# EAGLE board board (EAGLE 9.6.2)
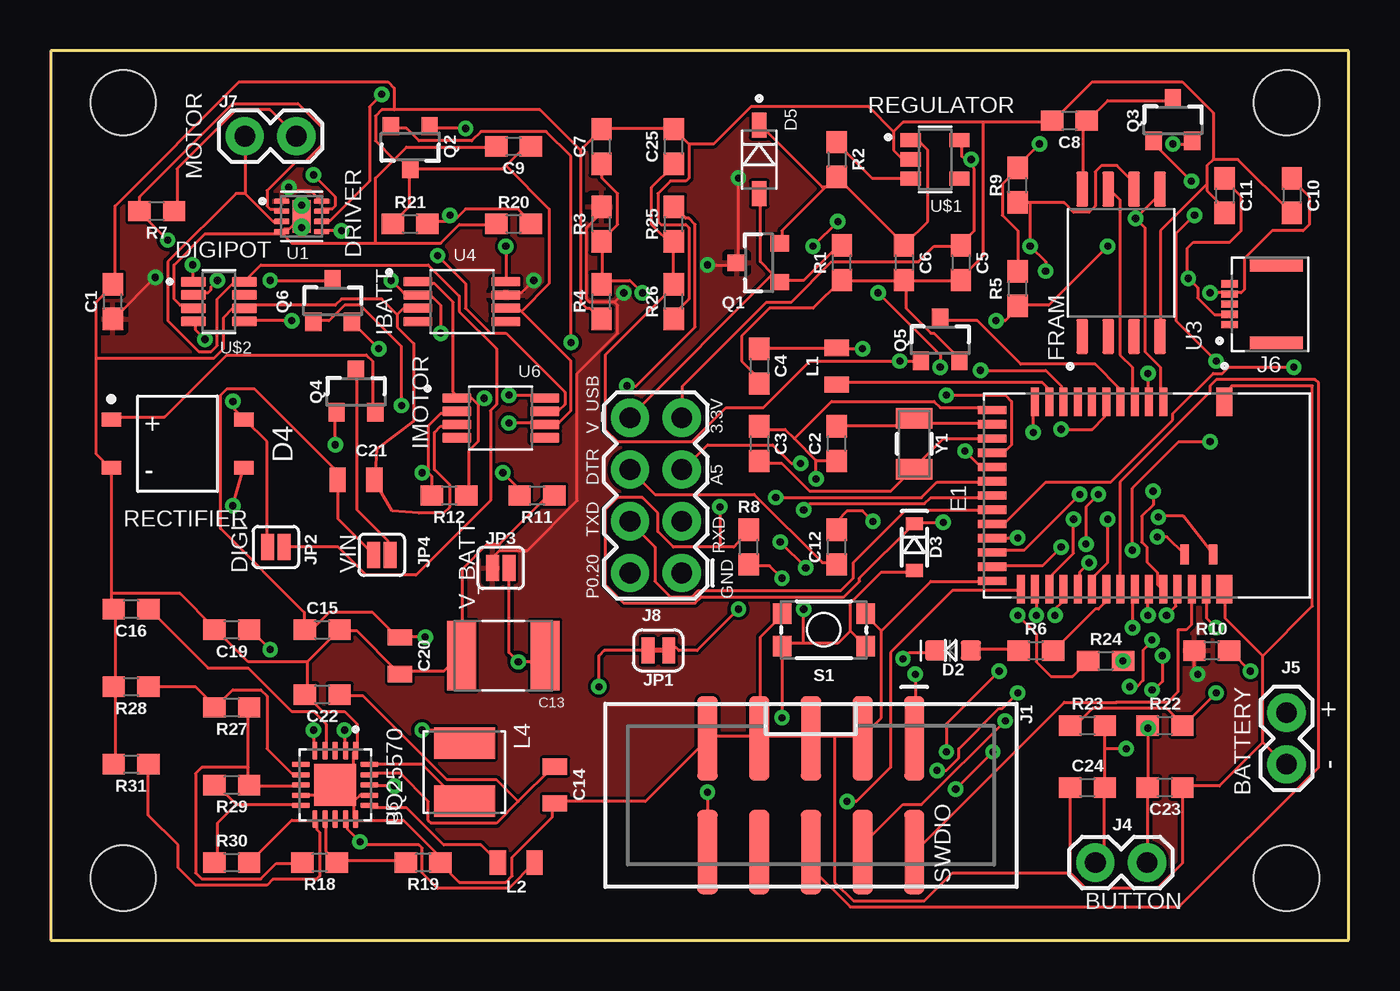
[diagram p0: board, top side]
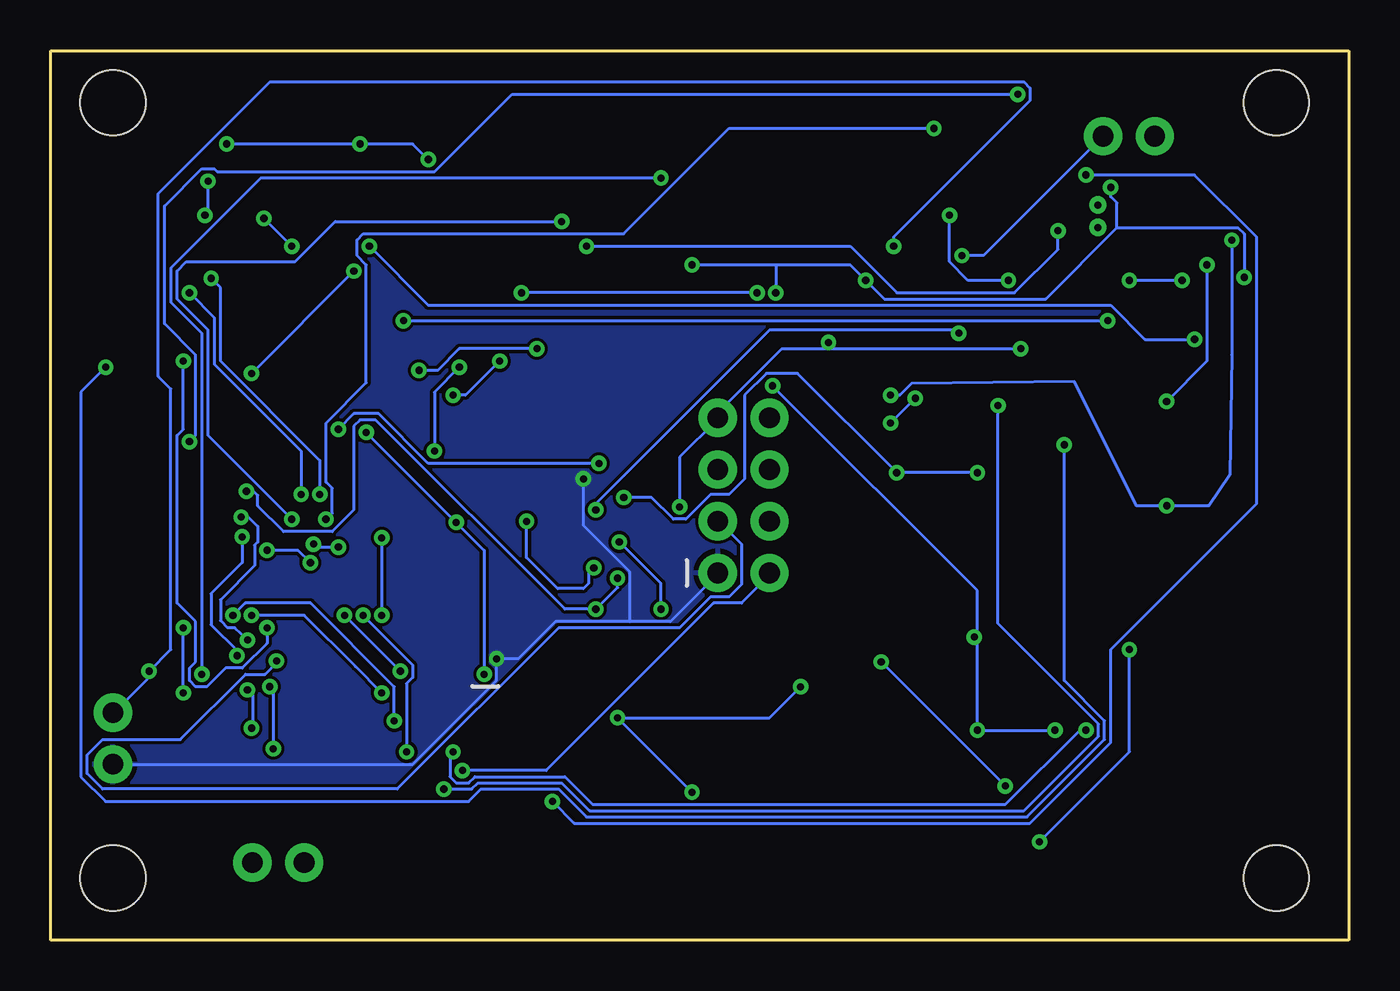
[diagram p1: board, bottom side, seen from below]

Size 63.75 x 43.69 mm. Coordinates in mm from the lower left corner, seen from the top.
Outline: 0,0 63.75,0 63.75,43.69 0,43.69 0,0
Copper layers (1*16): Top 0.035mm / dielectric 1.5mm / Bottom 0.035mm
Design rules "default": minimum track width 6mil, minimum drill 0.35mm, track to track 6mil, track to pad 6mil, pad to pad 6mil, via to via 6mil, smd to smd 6mil, copper to edge 40mil, drill to drill 6mil, minimum pad ring 10mil, minimum via ring 8mil, stop-mask expansion 4mil, vias tented up to drill 0mil, thermal gap 10mil
Holes 3.2 mm at 3.56,3.05 3.56,41.15 60.71,41.15 60.71,3.05

## Footprints (pad centres in the part's own frame; a part is rotated, then mirrored left to right if it is on the bottom)
0603 = smd 1.1 x 1: 1 -0.85,0; 2 0.85,0
CAPC4532X127N = smd 1.41 x 3.42: 1 -2.049,0; 2 2.049,0
0805 = smd 0.8 x 1.2: 1 -0.9,0; 2 0.9,0
LED-0603 = smd 1 x 1: A -0.877,0; C 0.877,0
SOD-323 = smd 0.63 x 0.83: A 1.15,0; C -1.15,0
COMCHIP_CDBHD140L-G_0 = smd 0.686 x 0.965: 1 1.18,3.255; 2 -1.18,3.255; 3 -1.18,-3.255; 4 1.18,-3.255
SOD3715X145N = smd 1.21 x 0.73: A 1.68,0; C -1.68,0
RAYTAC_MDBT42Q-512KV2 = smd 1.4 x 0.8: 1 -4.6,3.8; 39 4.6,3.8 | smd 1.4 x 0.4: 2 -4.6,0.8; 3 -4.6,0.1; 4 -4.6,-0.6; 5 -4.6,-1.3; 6 -4.6,-2; 7 -4.6,-2.7; 8 -4.6,-3.4; 9 -4.6,-4.1; 10 -4.6,-4.8; 11 -4.6,-5.5; 25 4.6,-6.2; 26 4.6,-5.5; 27 4.6,-4.8; 28 4.6,-4.1; 29 4.6,-3.4; 30 4.6,-2.7; 31 4.6,-2; 32 4.6,-1.3; 33 4.6,-0.6; 34 4.6,0.1; 35 4.6,0.8; 36 4.6,1.5; 37 4.6,2.2; 38 4.6,2.9 | smd 0.4 x 1.4: 12 -4.2,-7.6; 13 -3.5,-7.6; 14 -2.8,-7.6; 15 -2.1,-7.6; 16 -1.4,-7.6; 17 -0.7,-7.6; 18 0,-7.6; 19 0.7,-7.6; 20 1.4,-7.6; 21 2.1,-7.6; 22 2.8,-7.6; 23 3.5,-7.6; 24 4.2,-7.6 | smd 1 x 0.4: 40 2.9,3.25; 41 2.9,1.85
2X5-SHROUDED_SMD = smd 4.15 x 1: 1 -2.794,5.08; 2 2.794,5.08; 3 -2.794,2.54; 4 2.794,2.54; 5 -2.794,0; 6 2.794,0; 7 -2.794,-2.54; 8 2.794,-2.54; 9 -2.794,-5.08; 10 2.794,-5.08
1X02 = drill 1.016 pad 1.88: 1 0,0; 2 2.54,0
MOLEX_51281-0594 = smd 0.35 x 0.8: 1 -1,0; 2 -0.5,0; 3 0,0; 4 0.5,0; 5 1,0 | smd 0.6 x 2.6: SH1 -1.9,-2.3; SH2 1.9,-2.3
2X4 = drill 1.016 pad 1.88: 1 -3.81,-1.27; 2 -3.81,1.27; 3 -1.27,-1.27; 4 -1.27,1.27; 5 1.27,-1.27; 6 1.27,1.27; 7 3.81,-1.27; 8 3.81,1.27
SMT-JUMPER_2_NC_TRACE_SILK = smd 0.635 x 1.27: 1 -0.508,0; 2 0.508,0
SMT-JUMPER_2_NO_SILK = smd 0.635 x 1.27: 1 -0.406,0; 2 0.406,0
IND_LQH44PN220MP0L = smd 1.55 x 3: 1 -1.425,0; 2 1.425,0
SOT23-3 = smd 0.8 x 0.9: 1 -0.95,-1; 2 0.95,-1; 3 0,1.1
TACTILE_SWITCH_SMD_4.6X2.8MM = smd 0.9 x 1: 1 -2.05,-0.8; 2 2.05,-0.8; 3 2.05,0.8; 4 -2.05,0.8
SON50P200X200X80-9N = smd 0.74 x 0.28: 1 -0.985,0.75; 2 -0.985,0.25; 3 -0.985,-0.25; 4 -0.985,-0.75; 5 0.985,-0.75; 6 0.985,-0.25; 7 0.985,0.25; 8 0.985,0.75 | smd 0.9 x 1.6: 9 0,0 | drill 0.35 pad 0.61: 9_1 0,0.55; 9_2 0,-0.55
SOP127P797X210-8N = smd 1.72 x 0.59: 1 -3.62,1.905; 2 -3.62,0.635; 3 -3.62,-0.635; 4 -3.62,-1.905; 5 3.62,-1.905; 6 3.62,-0.635; 7 3.62,0.635; 8 3.62,1.905
SOP65P490X110-8N = smd 1.42 x 0.47: 1 -2.165,0.975; 2 -2.165,0.325; 3 -2.165,-0.325; 4 -2.165,-0.975; 5 2.165,-0.975; 6 2.165,-0.325; 7 2.165,0.325; 8 2.165,0.975
QFN50P350X350X100-21N = smd 0.88 x 0.26: 1 -1.685,1; 2 -1.685,0.5; 3 -1.685,0; 4 -1.685,-0.5; 5 -1.685,-1; 11 1.685,-1; 12 1.685,-0.5; 13 1.685,0; 14 1.685,0.5; 15 1.685,1 | smd 0.26 x 0.88: 6 -1,-1.685; 7 -0.5,-1.685; 8 0,-1.685; 9 0.5,-1.685; 10 1,-1.685; 16 1,1.685; 17 0.5,1.685; 18 0,1.685; 19 -0.5,1.685; 20 -1,1.685 | smd 2.05 x 2.05: 21 0,0
IC_XC8107AC20MR-G = smd 1 x 0.7: 1 -1.2,0.95; 2 -1.2,0; 3 -1.2,-0.95; 4 1.2,-0.95; 5 1.2,0.95
SOT65P280X145-8N = smd 1.21 x 0.48: 1 -1.255,0.975; 2 -1.255,0.325; 3 -1.255,-0.325; 4 -1.255,-0.975; 5 1.255,-0.975; 6 1.255,-0.325; 7 1.255,0.325; 8 1.255,0.975
CRYSTAL-SMD-3.2X1.5MM = smd 1 x 1.8: P$1 -1.25,0; P$2 1.25,0

## Placement (x,y rotation side)
C1  0.1uF  [0603]  3.05,31.37 90 top
C2  22pF  [0603]  38.61,24.38 90 top
C3  22pF  [0603]  34.8,24.38 270 top
C4  1.0uF  [0603]  34.8,28.19 270 top
C5  10uF  [0603]  44.7,33.27 270 top
C6  10uF  [0603]  41.91,33.27 270 top
C7  10uF  [0603]  27.05,38.99 90 top
C8  0.1uF  [0603]  50.04,40.26 180 top
C9  0.1uF  [0603]  22.73,38.99 180 top
C10  300pF  [0603]  60.96,36.58 270 top
C11  300pF  [0603]  57.66,36.58 270 top
C12  0.1uF  [0603]  38.61,19.3 90 top
C13  100uF  [CAPC4532X127N]  22.23,13.97 180 top
C14  4.7uF  [0805]  24.77,7.62 270 top
C15  0.1uF  [0603]  13.34,15.24 0 top
C16  0.01uF  [0603]  3.94,16.26 180 top
C19  22uF  [0603]  8.89,15.24 180 top
C20  4.7uF  [0805]  17.14,13.97 270 top
C21  2.2uF  [0805]  14.99,22.61 0 top
C22  0.1uF  [0603]  13.34,12.07 180 top
C23  33nF  [0603]  54.74,7.49 180 top
C24  33nF  [0603]  50.93,7.49 0 top
C25  10uF  [0603]  30.61,38.99 90 top
D2  WHITE  [LED-0603]  44.32,14.22 180 top
D3  250mA/100V  [SOD-323]  42.42,19.3 270 top
D4  COMCHIP_CDBHD140L-GCOMCHIP_CDBHD140L-G_0_0  [COMCHIP_CDBHD140L-G_0]  6.22,24.38 90 top
D5  SCHOTTKY  [SOD3715X145N]  34.8,38.35 270 top
E1  MDBT42Q-512KV2  [RAYTAC_MDBT42Q-512KV2]  53.85,21.84 270 top
J1  [2X5-SHROUDED_SMD]  37.34,7.11 270 top
J4  [1X02]  53.85,3.81 180 top
J5  [1X02]  60.71,11.18 270 top
J6  51281-0594  [MOLEX_51281-0594]  57.91,31.24 90 top
J7  [1X02]  9.52,39.5 0 top
J8  [2X4]  29.72,21.84 90 top
JP1  JUMPER-SMT_2_NC_TRACE_SILK  [SMT-JUMPER_2_NC_TRACE_SILK]  29.84,14.22 180 top
JP2  JUMPER-SMT_2_NO_SILK  [SMT-JUMPER_2_NO_SILK]  11.05,19.3 180 top
JP3  JUMPER-SMT_2_NO_SILK  [SMT-JUMPER_2_NO_SILK]  22.1,18.29 0 top
JP4  JUMPER-SMT_2_NO_SILK  [SMT-JUMPER_2_NO_SILK]  16.26,18.92 180 top
L1  10µH  [0805]  38.61,28.19 90 top
L2  3.3µH/±20%/450mA  [0805]  22.86,3.81 180 top
L4  LQH44PN220MP0L  [IND_LQH44PN220MP0L]  20.32,8.25 270 top
Q1  [SOT23-3]  34.8,33.27 90 top
Q2  2.5A/30V/105mΩ  [SOT23-3]  17.65,38.99 180 top
Q3  2.5A/30V/105mΩ  [SOT23-3]  55.12,40.26 0 top
Q4  2.5A/30V/105mΩ  [SOT23-3]  14.99,26.92 0 top
Q5  5.8A/30V/35mΩ  [SOT23-3]  43.69,29.46 0 top
Q6  2.5A/30V/105mΩ  [SOT23-3]  13.84,31.37 0 top
R1  100k  [0603]  38.86,33.27 90 top
R2  100k  [0603]  38.61,38.35 270 top
R3  820K  [0603]  27.05,35.18 90 top
R4  2M  [0603]  27.05,31.37 90 top
R5  10k  [0603]  47.5,32 90 top
R6  1k  [0603]  48.39,14.22 0 top
R7  1K  [0603]  5.21,35.81 180 top
R8  10k  [0603]  34.29,19.3 90 top
R9  10k  [0603]  47.5,37.08 90 top
R10  1K  [0603]  57.02,14.22 0 top
R11  10k  [0603]  23.88,21.84 180 top
R12  10k  [0603]  19.56,21.84 180 top
R18  4.22M  [0603]  13.21,3.81 180 top
R19  8.66M  [0603]  18.29,3.81 180 top
R20  10k  [0603]  22.73,35.18 0 top
R21  10k  [0603]  17.65,35.18 0 top
R22  1M  [0603]  54.74,10.54 0 top
R23  1M  [0603]  50.93,10.54 0 top
R24  1k  [0603]  51.82,13.72 0 top
R25  820k  [0603]  30.61,35.18 90 top
R26  2.0M  [0603]  30.61,31.37 90 top
R27  7.5M  [0603]  8.89,11.43 180 top
R28  5.76M  [0603]  3.94,12.45 180 top
R29  887K  [0603]  8.89,7.62 180 top
R30  6.98M  [0603]  8.89,3.81 0 top
R31  5.36M  [0603]  3.94,8.64 180 top
S1  [TACTILE_SWITCH_SMD_4.6X2.8MM]  37.97,15.24 0 top
U1  DRV8837DSGR  [SON50P200X200X80-9N]  12.32,35.56 0 top
U3  MB85RC256VPF-G-JNERE2  [SOP127P797X210-8N]  52.58,33.27 90 top
U4  MAX9934TAUA  [SOP65P490X110-8N]  20.19,31.37 0 top
U5  BQ25570RGRR  [QFN50P350X350X100-21N]  13.97,7.62 270 top
U6  MAX9934TAUA  [SOP65P490X110-8N]  22.1,25.65 0 top
U$1  IC_X8107AC20MR-GSMD  [IC_XC8107AC20MR-G]  43.43,38.35 0 top
U$2  AD5273  [SOT65P280X145-8N]  8.26,31.37 0 top
Y1  32.768kHz  [CRYSTAL-SMD-3.2X1.5MM]  42.42,24.38 270 top

## Library data of the parts
C1 C8 C9 C12 C15 C16 C19 C22 = SparkFun-Capacitors; PROD_ID: CAP-00810
C2 C3 = SparkFun-Capacitors; PROD_ID: CAP-07876
C4-C7 = SparkFun-Capacitors; PROD_ID: CAP-00868
C10 C11 C23 C24 = SparkFun-Capacitors; PROD_ID: CAP-07887
C13 = LD125C274JAB2A; AVAILABILITY: In Stock; DESCRIPTION: CAP 0.27UF 50VDC X7R 5% SMD 1812; MF: AVX; MP: LD125C274JAB2A; PACKAGE: 1812 AVX; PRICE: None; PURCHASE-URL: https://pricing.snapeda.com/search/part/LD125C274JAB2A/?ref=eda
C14 C20 = SparkFun-Capacitors; PROD_ID: CAP-11625
C21 = SparkFun-Capacitors; PROD_ID: CAP-11624
C25 = SparkFun-Capacitors; PROD_ID: CAP-11015
D2 = SparkFun-LED; PROD_ID: DIO-09004
D3 = SparkFun-DiscreteSemi; PROD_ID: DIO-09646
D4 = Comchip - CDBHD140L-G; CENTROID_NOT_SPECIFIED: No; CURRENT_-_AVERAGE_RECTIFIED_(IO): 1A; CURRENT_-_REVERSE_LEAKAGE_@_VR: 500µA @ 40V; DATASHEET: http://www.comchiptech.com/cms/UserFiles/CDBHD140L-G%20Thru.%20CDBHD1100L-G%20RevC.PDF; DIGIKEY_DESCRIPTION: DIODE SCHOTTKY 1A 40V TO-269AA; DIGIKEY_PART_NUMBER: 641-1210-1-ND; LEAD_FREE: yes; MANUFACTURER_PRODUCT_PAGE: http://www.comchiptech.com/products_search.php?banner=top2&partnumber1=CDBHD140L-G&link=products_search.php; MF: Comchip; MFG_PACKAGE_IDENT: Mini-DIP; MOUSER_PART_NUMBER: 750-CDBHD140L-G; MPN: CDBHD140L-G; PACKAGE: 4-BESOP; PREFIX: D; ROHS: yes; TEMPERATURE_RANGE_HIGH: +125°C; TEMPERATURE_RANGE_LOW: -55°C; VOLTAGE_-_FORWARD_(VF)_(MAX)_@_IF: 440mV @ 1A; VOLTAGE_-_PEAK_REVERSE_(MAX): 40V
D5 = 1N5819HW-7-F; AVAILABILITY: In Stock; DESCRIPTION: Diode Schottky 40 V 1A Surface Mount SOD-123; MF: Diodes Inc.; MP: 1N5819HW-7-F; PACKAGE: SOD-123 Fairchild Semiconductor; PRICE: None; PURCHASE-URL: https://pricing.snapeda.com/search/part/1N5819HW-7-F/?ref=eda
E1 = MDBT42Q-512KV2; AVAILABILITY: In Stock; DESCRIPTION: 802.15.4, Bluetooth Bluetooth v5.2, Zigbee® Transceiver Module 2.36GHz ~ 2.5GHz Integrated, Chip Surface Mount; MF: Raytac Corporation; MP: MDBT42Q-512KV2; PACKAGE: SMD-41 Raytac Corporation; PRICE: None; PURCHASE-URL: https://pricing.snapeda.com/search/part/MDBT42Q-512KV2/?ref=eda
J1 = SparkFun-Connectors; PROD_ID: CONN-09508
J4 J5 J7 J8 = SparkFun-Connectors
J6 = 51281-0594; AVAILABILITY: In Stock; DESCRIPTION: 5 Position FFC, FPC Connector Contacts, Top and Bottom 0.020 (0.50mm) Surface Mount, Right Angle; MF: Molex; MP: 51281-0594; PACKAGE: None; PRICE: None; PURCHASE-URL: https://pricing.snapeda.com/search/part/51281-0594/?ref=eda
JP1-JP4 = SparkFun-Jumpers
L1 L2 = SparkFun-Coils; PROD_ID: NDUC-13076
L4 = LQH44PN220MP0L; AVAILABILITY: In Stock; DESCRIPTION: Inductor with Inductance: 22uH Tol. +/-20%, Package: 1515 (4040); MF: Murata; MP: LQH44PN220MP0L; PACKAGE: NONSTANDARD; PRICE: None; PURCHASE-URL: https://pricing.snapeda.com/search/part/LQH44PN220MP0L/?ref=eda
Q1-Q4 Q6 = SparkFun-DiscreteSemi; PROD_ID: TRANS-11308
Q5 = SparkFun-DiscreteSemi; PROD_ID: TRANS-12988
R1 R2 R18 R19 = SparkFun-Resistors; PROD_ID: RES-07828
R3 R4 R22 R23 = SparkFun-Resistors; PROD_ID: RES-07868
R5 R8 R9 R11 R12 R20 R21 = SparkFun-Resistors; PROD_ID: RES-00824
R6 R24 R27-R31 = SparkFun-Resistors; PROD_ID: RES-07856
R7 = SparkFun-Resistors; PROD_ID: RES-12535
R10 = SparkFun-Resistors; PROD_ID: RES-08269
R25 = SparkFun-Resistors; PROD_ID: RES-13247
R26 = SparkFun-Resistors; PROD_ID: RES-10054
S1 = SparkFun-Switches; PROD_ID: SWCH-13065
U1 = DRV8837DSGR; AVAILABILITY: In Stock; DESCRIPTION: 11-V, 1.8-A H-bridge motor driver 8-WSON -40 to 85; MF: Texas Instruments; MP: DRV8837DSGR; PACKAGE: WSON-8 Texas Instruments; PRICE: None; PURCHASE-URL: https://pricing.snapeda.com/search/part/DRV8837DSGR/?ref=eda
U3 = MB85RC256VPF-G-JNERE2; AVAILABILITY: In Stock; MF: Fujitsu Semiconductor; MP: MB85RC256VPF-G-JNERE2; PACKAGE: None; PRICE: None; PURCHASE-URL: https://pricing.snapeda.com/search/part/MB85RC256VPF-G-JNERE2/?ref=eda
U4 U6 = MAX9934TAUA; AVAILABILITY: In Stock; DESCRIPTION: Current Sense Amplifier 1 Circuit 8-uMAX-EP|8-uSOP-EP; MF: Maxim Integrated; MP: MAX9934TAUA+T; PACKAGE: MICRO MAX-8 Maxim; PRICE: None; PURCHASE-URL: https://pricing.snapeda.com/search/part/MAX9934TAUA+T/?ref=eda
U5 = BQ25570RGRR; AVAILABILITY: In Stock; DESCRIPTION: Ultra Low power Harvester power Management IC with boost charger, and Nanopower Buck Converter 20-VQFN -40 to 125; MF: Texas Instruments; MP: BQ25570RGRR; PACKAGE: VQFN-20 Texas Instruments; PRICE: None; PURCHASE-URL: https://pricing.snapeda.com/search/part/BQ25570RGRR/?ref=eda
U$1 = XC6210B332MR
U$2 = SOT65P280X145-8N
Y1 = SparkFun-Clocks; PROD_ID: XTAL-13062

## Nets
3.3V: C5.1 D3.C E1.11 J1.1 J8.7 Q2.2 Q3.2 Q6.2 R5.2 R8.2 R9.2 U$1.5
A5: E1.6 J8.5
BEN: E1.28 U5.5
CAPREC1: C23.2 E1.41 J4.1 R22.1
CAPREC2: C24.2 E1.40 J4.2 R23.2
CAPSEND: E1.38 R22.2 R23.1
DIGIEN: E1.26 Q6.1
DIGIPOT: D4.4 JP2.2 U$2.1
DTR: C12.1 J8.6
EN: R2.1 U$1.3
GND: C1.2 C2.1 C3.1 C4.2 C5.2 C6.2 C7.2 C8.2 C9.2 C10.2 C11.2 C13.2 C14.2 C15.2 C16.2 C19.2 C20.2 C21.2 C22.2 C23.1 C24.1 C25.2 D2.C D4.2 E1.1 E1.12 E1.24 E1.39 J1.3 J1.5 J1.7 J1.9 J5.2 J8.1 Q5.2 R1.1 R4.1 R11.1 R19.1 R20.1 R26.1 R28.2 R31.2 S1.3 S1.4 U1.4 U1.9 U3.4 U4.3 U5.1 U5.9 U5.15 U5.17 U5.21 U6.3 U$1.2 U$2.3 U$2.6
IBATT: E1.18 R20.2 R21.2 U4.2
IMOTOR: E1.17 R11.2 R12.2 U6.2
INTERRUPT: E1.5 Q5.3
LED1: E1.31 R6.2
MI: D4.3 R7.2 U1.2 U6.8
MIN1: J7.2 R7.1 U6.7
MIN2: J7.1 JP2.1 U1.3 U$2.8
MONEN: E1.27 Q2.1
N$1: E1.10 L1.1
N$2: L4.2 U5.20
N$3: C3.2 E1.14 Y1.P$2
N$4: C4.1 E1.9 L1.2
N$5: D4.1 Q4.2
N$6: L2.2 U5.16
N$7: C12.2 JP1.1
N$8: C6.1 D5.C Q1.2 R2.2 U$1.1
N$9: Q6.3 U$2.2
N$10: C13.1 JP3.2 U5.18
N$11: C2.2 E1.13 Y1.P$1
N$12: C8.1 Q3.3 U3.8
N$13: JP4.1 Q4.3
N$14: D2.A R6.1
N$15: J8.3 R24.2
NFC1: C11.1 E1.22 J6.2
NFC2: C10.1 E1.23 J6.4
OK_HYST: R29.2 R30.1 U5.10
OK_PROG: R30.2 R31.1 U5.11
P0.20: E1.34 J8.2
PWM1: E1.29 U1.6
PWM2: E1.30 U1.5
RAMEN: E1.33 Q3.1
RECEN: E1.20 Q4.1
RESET: D3.A E1.35 J1.10 JP1.2 R8.1 S1.1 S1.2
RXD: E1.21 R24.1
SCL: E1.3 R9.1 U3.6 U$2.4
SDA: E1.2 R5.1 U3.5 U$2.5
SLP: E1.25 U1.7
SWDCLK: E1.36 J1.4
SWDIO: E1.37 J1.2
SWO: E1.32 J1.6
TXD: E1.19 J8.4
V_BATT: C1.1 JP3.1 Q1.3 R3.2 R10.1 U1.1 U1.8 U4.7
V_USB: D5.A J8.8 Q1.1 R1.2
VBAT_OV: R27.2 R28.1 U5.7
VBATM: C7.1 E1.16 R3.1 R4.2
VCC: C9.1 Q2.3 R12.1 R21.1 U4.1 U4.6 U6.1 U6.6
VIN: C15.1 C20.1 C21.1 JP4.2 L4.1 R25.2 U5.2
VINM: C25.1 E1.15 Q5.1 R25.1 R26.2
VLIPO: J5.1 R10.2 U4.8
VOUT: C19.1 L2.1 U5.14
VOUT_SET: R18.1 R19.2 U5.12
VRDIV: R18.2 R27.1 R29.1 U5.8
VREF_SAMP: C16.1 U5.4
VSTOR: C14.1 C22.1 U5.19
WP: E1.4 U3.7

## Tracks (layer width: path | path; a pad name or v marks a point on that pad's centre or on a via)
3.3V  (via drill 0.35)
  Top 0.152: 32.87,19.3 33.55,19.3 R8.2 | 32.87,19.3 30.58,19.3 29.82,20.07 29.82,20.98 29.06,21.74 27.84,21.74 27.23,21.13 27.23,17.47 28.14,16.56 31.65,16.56 31.95,16.87 38.96,16.87 39.73,17.63 39.73,17.78 42.32,20.37 D3.C 42.47,20.52 v43.84,20.52 | v48.26,24.94 48.26,26.31 E1.11 | v42.47,13.06 42.47,10.01 J1.1 | v55.12,39.12 56.03,39.12 Q3.2 | v48.56,39.12 47.5,38.05 R9.2 47.5,37.9 46.74,37.14 46.74,35.61 47.5,34.85 R5.2 | 45.06,38.2 45.36,37.9 45.36,34.85 44.75,34.24 C5.1 44.6,34.09 43.38,34.09 42.62,33.33 38.35,33.33 36.37,31.34 35.15,31.34 31.04,27.23 31.04,25.71 J8.7 | 45.06,38.2 44.75,38.51 44.75,39.27 U$1.5 | v16.1,29.06 14.88,30.28 Q6.2 | v25.55,29.36 25.55,38.51 24.33,39.73 21.13,39.73 20.68,39.27 18.09,39.27 17.48,39.88 16.71,39.88 Q2.2 | 45.06,38.2 v45.21,38.35 | v32.87,21.29 32.87,19.3
  Bottom 0.152: v48.26,24.94 v43.84,20.52 42.47,19.15 v42.47,13.06 | v55.12,39.12 v48.56,39.12 45.97,39.12 v45.21,38.35 | 25.55,29.06 27.84,29.06 30.89,26.01 30.89,25.71 J8.7 31.04,25.55 32.87,23.72 v32.87,21.29 | 25.55,29.06 v16.1,29.06 | 25.55,29.06 v25.55,29.36
A5  (via drill 0.35)
  Top 0.152: v49.63,25.1 51.16,25.1 51.77,25.71 51.77,26.31 E1.6 | v36.83,23.42 36.37,23.42 35.46,24.33 32.26,24.33 31.04,23.11 J8.5
  Bottom 0.152: v49.63,25.1 48.87,25.86 47.65,25.86 45.21,23.42 v36.83,23.42
BEN  (via drill 0.35)
  Top 0.152: v12.9,10.31 12.9,9.4 U5.5 | v43.99,9.25 43.99,10.62 v46.58,13.21 | v49.33,15.95 49.33,16.26 49.63,16.56 49.63,17.17 E1.28
  Bottom 0.152: v12.9,10.31 13.21,10.31 16.87,6.65 37.14,6.65 38.51,8.03 42.93,8.03 43.23,7.72 43.84,7.72 44.14,8.03 44.14,9.09 v43.99,9.25 | v49.33,15.95 v46.58,13.21
CAPREC1  (via drill 0.35)
  Top 0.152: R22.1 53.9,10.46 v53.9,10.41 53.9,7.57 C23.2 53.9,7.42 53.9,3.91 J4.1 | v54.36,19.81 54.83,19.81 E1.41 | v54.61,13.97 54.61,12.7 54.1,12.19 v54.1,12.29
  Bottom 0.152: v54.36,19.81 54.36,18.54 55.88,17.02 55.88,15.49 54.61,14.22 v54.61,13.97 | v54.1,12.29 53.85,12.04 53.85,10.41 v53.9,10.41
CAPREC2  (via drill 0.35)
  Top 0.152: 51.77,9.4 51.77,10.46 R23.2 | 51.77,9.4 51.77,7.57 C24.2 51.77,7.42 51.77,4.37 51.31,3.91 J4.2 | v54.4,20.78 54.45,20.83 55.63,20.83 E1.40 | v53,12.45 53.34,12.45 53.65,12.75 53.65,14.22 54.1,14.73 v54.09,14.74 | v52.83,9.4 51.77,9.4
  Bottom 0.152: v54.4,20.78 54.05,20.78 53.59,20.32 53.59,19.55 53.74,19.4 53.74,18.39 55.42,16.72 55.42,15.7 55.06,15.34 54.71,15.34 v54.09,14.74 | v53,12.45 52.83,12.28 v52.83,9.4
CAPSEND  (via drill 0.35)
  Top 0.152: R23.1 50.09,10.62 50.39,10.62 51.16,11.38 54.81,11.38 55.58,10.62 R22.2 55.73,10.62 v57.25,12.14 | v57.25,15.34 56.79,15.8 56.79,17.17 E1.38
  Bottom 0.152: v57.25,12.14 v57.25,15.34
DIGIEN  (via drill 0.35)
  Top 0.152: v17.22,26.26 17.22,29.16 15.19,31.19 14.43,31.19 13.66,30.43 12.9,30.43 Q6.1 | v46.28,9.25 v44.45,7.42 | v48.41,15.95 48.41,17.17 E1.26
  Bottom 0.152: v17.22,26.26 17.22,15.54 12.29,10.62 12.29,10.01 15.95,6.35 37.29,6.35 38.66,7.72 42.77,7.72 43.08,7.42 v44.45,7.42 | v46.28,9.25 46.28,12.6 45.97,12.9 45.97,13.51 v48.41,15.95
DIGIPOT  (via drill 0.35)
  Top 0.152: JP2.2 10.62,19.3 10.62,24.49 9.55,25.55 D4.4 9.4,25.71 8.94,26.16 v8.94,26.47 | v6.96,33.17 6.96,32.41 U$2.1
  Bottom 0.152: v6.96,33.17 6.96,28.45 v8.94,26.47
DTR
  Top 0.152: J8.6 29.67,21.89 34.54,21.89 37.9,18.54 38.51,18.54 C12.1
EN
  Top 0.152: U$1.3 42.16,37.44 40.33,37.44 38.66,39.12 R2.1
GND  (via drill 0.35)
  Top 0.152: U1.4 11.23,34.7 7.57,34.7 6.05,33.17 6.05,31.5 6.35,31.19 6.96,31.19 U$2.3 | 15.95,34.24 11.84,34.24 11.38,34.7 U1.4 | 15.95,34.24 19.15,34.24 20.07,35.15 21.74,35.15 R20.1 | 16.87,38.35 15.95,37.44 15.95,34.24 | 16.87,38.35 17.48,38.96 21.74,38.96 C9.2 | 56.79,37.14 56.79,38.05 57.1,38.35 | 56.79,37.14 56.79,36.83 57.56,36.07 57.56,35.76 C11.2 | 57.1,38.35 58.32,38.35 60.91,35.76 C10.2 | 56.79,37.14 54.51,34.85 54.51,29.67 U3.4 | 31.34,39.12 31.34,37.44 31.19,37.29 30.43,37.29 29.82,36.68 29.82,35.31 29.97,35.15 31.19,35.15 31.34,35 31.34,31.5 30.73,30.89 30.73,30.58 R26.1 | 31.34,39.12 30.73,39.73 C25.2 30.58,39.88 27.08,39.88 C7.2 26.92,39.73 26.01,38.81 | 26.01,38.81 26.01,31.34 26.31,31.04 26.47,31.04 26.92,30.58 R4.1 | U$1.2 41.86,38.35 41.4,38.81 41.4,39.73 | 41.4,39.73 41.86,40.18 45.82,40.18 | 45.82,40.18 49.17,40.18 C8.2 49.33,40.34 51.16,42.16 55.58,42.16 57.1,40.64 57.1,38.35 | 42.01,32.41 42.01,31.04 43.23,29.82 43.38,29.82 44.6,28.6 Q5.2 | 42.01,32.41 44.6,32.41 C5.2 44.75,32.56 45.82,33.63 45.82,40.18 | 42.01,32.41 C6.2 41.86,32.41 38.96,32.41 R1.1 38.81,32.41 37.44,31.04 35.31,31.04 33.93,29.67 33.93,28.45 34.7,27.69 34.7,27.38 C4.2 | 31.34,39.12 32.56,39.12 34.39,40.95 40.18,40.95 41.4,39.73 | 16.87,38.35 15.95,39.27 15.95,40.49 16.26,40.79 16.87,40.79 | 16.87,40.79 24.03,40.79 26.01,38.81 | 37.59,23.57 38.51,23.57 C2.1 | 36.53,24.64 36.07,25.1 34.85,25.1 C3.1 | 36.53,24.64 37.59,23.57 | 36.53,24.64 38.35,26.47 43.38,26.47 43.69,26.16 46.13,26.16 E1.12 | v41.86,13.82 42.16,14.12 43.38,14.12 D2.C | v37.59,22.66 37.59,23.57 | 50.09,3.3 50.09,7.42 C24.1
  Top 0.152: 50.09,3.3 50.85,2.54 54.36,2.54 55.58,3.76 55.58,7.42 C23.1 55.73,7.57 57.4,7.57 59.54,9.7 | 59.54,13.97 57.71,15.8 57.71,17.17 E1.39 | 59.54,9.7 59.54,13.97 | 59.54,9.7 60.6,8.64 J5.2 | 59.54,13.97 61.98,16.41 61.98,27.23 58.01,27.23 57.71,26.92 57.71,26.47 E1.1 | 17.02,30.73 17.02,30.12 17.83,29.31 17.83,25.5 16,24.13 15.91,22.56 | 17.02,30.73 17.32,31.04 17.93,31.04 U4.3 | 17.02,30.73 16.26,31.5 14.27,31.5 13.97,31.19 9.55,31.19 U$2.6 9.4,31.04 8.94,31.04 8.48,30.58 8.48,29.06 8.03,28.6 2.23,28.6 | U6.3 19.91,25.25 19.15,25.25 18.85,24.94 18.85,23.11 19.61,22.35 19.61,21.29 19.3,20.98 18.09,20.98 16.76,21.08 15.91,22.56 | 3.15,12.45 3.15,8.64 R31.2 | 3,17.02 3,16.26 C16.2 3.15,16.26 3.15,12.45 | 3,17.02 3,23.11 D4.2 2.84,23.27 2.23,23.88 2.23,28.6 | 2.23,28.6 2.23,31.34 3,32.11 C1.2 3.15,32.26 3.15,36.07 9.25,42.16 16.56,42.16 16.87,41.86 16.87,40.79 | 3.15,12.45 R28.2 | 34.85,10.01 34.85,14.88 35.92,15.95 S1.4 | 40.79,15.19 40.03,15.95 S1.3 | 40.79,15.19 40.79,10.92 39.88,10.01 | 40.79,15.19 43.23,17.63 46.13,17.63 E1.24 | 39.88,10.01 38.51,10.01 | 38.51,10.01 37.44,10.01 J1.5 37.29,10.01 34.85,10.01 | 39.88,10.01 J1.3 | 34.85,10.01 J1.7 34.7,10.01 32.26,10.01 J1.9 32.26,9.86 29.21,6.81 24.79,6.81 C14.2 24.64,6.65 24.64,6.04 22.66,4.06 22.66,3.15 22.35,2.84 20.07,2.84 19.15,3.76 R19.1 19,3.91 19,4.22 17.32,5.89 15.04,5.89 U5.15 14.88,6.04 14.88,6.65 | 13.97,7.57 13.51,7.11 12.29,7.11 U5.9 | 14.88,6.65 14.88,6.81 15.19,7.11 15.65,7.11 U5.17 | 14.88,6.65 13.97,7.57 | 13.97,7.57 U5.21 13.97,7.72 14.88,8.64 14.88,9.25 U5.1 15.04,9.4 15.04,10.62 14.43,11.23 13.36,11.23 12.6,11.99 C22.2 12.6,12.14 12.6,13.67
  Top 0.152: 12.6,13.67 14.12,15.19 C15.2 14.27,15.19 15.04,15.19 17.02,13.21 C20.2 17.17,13.21 19.3,13.21 20.07,13.97 C13.2 20.22,13.97 20.22,18.24 21.44,19.46 22.05,19.46 24.33,21.74 24.64,21.74 R11.1 | 12.6,13.67 9.7,13.67 8.18,15.19 C19.2 8.03,15.34 6.35,17.02 3,17.02 | 50.09,3.3 44.3,3.3 42.93,1.93 39.42,1.93 38.51,2.84 38.51,10.01 | U1.4 11.46,34.94 11.7,34.94 U1.9 | 15.91,22.56 C21.2
  Bottom 0.152: 35.31,15.65 33.33,15.65 31.04,17.93 J8.1 | 35.31,15.65 38.96,15.65 40.79,13.82 v41.86,13.82 41.86,12.75 45.97,8.64 J5.2 | v37.59,22.66 37.59,20.37 35.31,18.08 35.31,15.65
  pour Bottom: 1.78,42.16 1.78,1.52 62.74,1.52 62.74,42.16
IBATT  (via drill 0.35)
  Top 0.152: 19.61,35.31 19.76,35.31 20.37,35.92 22.96,35.92 23.57,35.31 R20.2 | 19.61,35.31 18.54,35.31 R21.2 | v36.98,21.13 37.29,21.44 42.93,21.44 43.23,21.74 46.13,21.74 E1.18 | v19.15,29.82 19.15,31.19 18.69,31.65 18.09,31.65 U4.2 17.93,31.8 17.32,31.8 v16.71,32.41 | v19.61,35.61 19.61,35.31
  Bottom 0.152: v36.98,21.13 36.98,21.44 28.45,29.97 19.3,29.97 v19.15,29.82 | v19.61,35.61 19.61,33.33 18.69,32.41 v16.71,32.41
IMOTOR  (via drill 0.35)
  Top 0.152: 18.54,22.96 18.69,22.81 18.69,21.89 R12.2 | 18.54,22.96 18.54,25.25 19.15,25.86 19.91,25.86 U6.2 | v22.2,22.96 22.96,22.2 22.96,21.89 R11.2 | 18.54,22.96 v18.24,22.96 | v35.61,21.74 42.77,21.74 43.54,22.5 46.13,22.5 E1.17
  Bottom 0.152: v18.24,22.96 v22.2,22.96 27.08,27.84 28.6,27.84 29.67,26.77 29.67,22.66 30.43,21.89 31.34,21.89 32.56,20.68 33.17,20.68 34.24,21.74 v35.61,21.74
INTERRUPT
  Top 0.152: Q5.3 43.69,30.43 45.52,30.43 47.65,28.3 51.31,28.3 52.53,27.08 52.53,26.47 E1.5
LED1
  Top 0.152: R6.2 49.33,14.28 51.31,16.26 51.46,16.26 51.77,16.56 51.77,17.17 E1.31
MI  (via drill 0.35)
  Top 0.152: U1.2 11.23,35.92 10.77,35.92 10.62,36.07 10.62,36.83 11.99,38.2 12.45,38.2 13.36,39.12 13.36,39.88 12.14,41.1 8.94,41.1 4.37,36.53 4.37,35.92 R7.2 4.37,35.76 v5.74,34.39 | v22.5,26.77 24.18,26.77 U6.8 | v8.94,21.34 D4.3
  Bottom 0.152: v5.74,34.39 5.74,28.75 5.84,22.86 6.86,21.34 v8.94,21.34 10.41,21.34 13.46,27.43 21.49,27.33 22.05,26.77 v22.5,26.77
MIN1  (via drill 0.35)
  Top 0.152: J7.2 10.77,40.79 9.09,40.79 6.2,37.9 6.2,35.92 R7.1 | v19,33.63 20.37,32.26 20.37,31.04 21.59,29.82 22.35,29.82 25.25,26.92 25.25,26.31 24.94,26.01 24.33,26.01 U6.7
  Bottom 0.152: v19,33.63 17.93,33.63 J7.2
MIN2
  Top 0.152: 9.55,36.68 10.92,35.31 11.23,35.31 U1.3 | 9.55,36.68 9.55,39.42 J7.1 | 9.55,36.68 9.09,36.68 5.74,33.33 5.74,30.43 7.26,28.9 7.87,28.9 8.18,29.21 8.18,31.5 8.94,32.26 9.4,32.26 U$2.8 9.55,32.41 10.31,33.17 18.54,33.17 20.07,31.65 20.07,30.89 21.89,29.06 21.89,26.31 21.59,26.01 21.59,21.59 17.93,17.93 15.49,17.93 14.12,19.3 JP2.1
MONEN  (via drill 0.35)
  Top 0.152: v20.37,39.88 18.69,39.88 Q2.1 | v50.24,20.68 50.24,19 49.17,17.93 49.17,17.32 E1.27
  Bottom 0.152: v20.37,39.88 30.43,39.88 35.61,34.7 48.41,34.7 48.72,34.39 48.72,33.63 48.26,33.17 48.26,27.38 50.24,25.4 50.24,22.5 49.94,22.2 49.94,20.98 v50.24,20.68
N$1
  Top 0.152: L1.1 38.66,27.38 48.72,27.38 49.02,27.08 49.02,26.47 E1.10
N$2
  Top 0.152: U5.20 15.8,8.64 18.24,8.64 19.91,6.96 20.22,6.96 L4.2
N$3
  Top 0.152: C3.2 34.85,23.42 35.92,23.42 37.29,22.05 41.25,22.05 42.32,23.11 Y1.P$2 42.47,23.27 43.84,24.64 46.13,24.64 E1.14
N$4  (via drill 0.35)
  Top 0.152: C4.1 34.85,29.06 38.51,29.06 L1.2 38.66,29.06 v39.88,29.06 | v45.67,27.99 48.87,27.99 49.63,27.23 49.63,26.47 E1.9
  Bottom 0.152: v45.67,27.99 44.75,27.99 43.69,29.06 v39.88,29.06
N$5
  Top 0.152: Q4.2 15.8,26.01 15.8,28.45 15.49,28.75 8.64,28.75 5.59,25.71 3,25.71 D4.1
N$6
  Top 0.152: U5.16 15.8,6.5 17.48,6.5 19.3,4.67 21.13,4.67 21.89,3.91 L2.2
N$7  (via drill 0.35)
  Top 0.152: v33.78,16.26 31.75,14.22 30.86,14.22 30.5,14.58 30.35,14.58 JP1.1 | v35.83,19.56 37.08,18.3 v37.08,18.29 | v40.39,20.57 39.88,21.08 39.12,21.08 38.61,20.57 C12.2
  Bottom 0.152: v33.78,16.26 33.78,17.53 35.81,19.56 v35.83,19.56 | v37.08,18.29 37.34,18.03 37.34,17.53 37.59,17.27 38.86,17.27 40.39,18.8 v40.39,20.57
N$8
  Top 0.152: U$1.1 42.32,39.27 42.62,39.27 43.08,38.81 43.08,35.31 42.01,34.24 C6.1 41.86,34.24 38.66,37.44 R2.2 38.51,37.44 38.05,36.98 | 38.05,36.98 35.92,34.85 35.92,34.24 Q1.2 | 38.05,36.98 37.9,36.98 34.85,40.03 D5.C
N$9  (via drill 0.35)
  Top 0.152: v10.77,32.41 13.82,32.41 Q6.3 | v8.18,32.41 7.87,32.11 7.87,31.95 7.72,31.8 7.11,31.8 U$2.2
  Bottom 0.152: v8.18,32.41 v10.77,32.41
N$10  (via drill 0.35)
  Top 0.152: v16.87,7.57 15.8,7.57 U5.18 | C13.1 24.18,13.97 23.88,13.67 v22.96,13.67 22.5,14.12 JP3.2
  Bottom 0.152: v22.96,13.67 v16.87,7.57
N$11
  Top 0.152: C2.2 38.66,25.25 42.01,25.25 42.32,25.55 Y1.P$1 42.47,25.55 42.62,25.4 46.13,25.4 E1.13
N$12
  Top 0.152: Q3.3 55.12,41.25 51.92,41.25 51,40.34 C8.1 50.85,40.18 50.7,40.03 50.7,36.98 U3.8
N$13
  Top 0.152: Q4.3 15.04,27.99 15.04,21.13 16.56,19.61 16.56,19 JP4.1
N$14
  Top 0.152: D2.A 45.21,14.28 47.5,14.28 R6.1
N$15  (via drill 0.35)
  Bottom 0.152: J8.3 30.89,20.52 29.82,19.46 29.82,17.47 30.43,16.87 31.34,16.87 32.87,15.34 38.81,15.34 46.74,7.42 61.21,7.42 61.98,8.18 61.98,9.09 61.21,9.86 57.4,9.86 54.19,13.06 53.24,13.06 52.58,13.72 R24.2
  other vias: 52.67,13.72
NFC1  (via drill 0.35)
  Top 0.152: J6.2 57.86,30.73 57.15,30.73 57.15,30.74 56.34,31.55 56.34,32.05 v55.88,32.51 55.83,32.56 55.83,33.98 56.13,34.29 57.91,34.29 58.47,34.85 58.47,36.53 57.71,37.29 C11.1 | v50.55,21.89 47.8,19.15 46.28,19.15 E1.22
  Bottom 0.152: v50.55,21.89 50.55,23.57 55.42,28.45 55.42,32.05 v55.88,32.51
NFC2  (via drill 0.35)
  Top 0.152: C10.1 61.06,37.29 61.82,36.53 61.82,35.15 61.52,34.85 60,34.85 58.62,33.48 58.62,31.95 58.47,31.8 58.01,31.8 J6.4 57.86,31.8 v56.95,31.8 | v49.63,19.3 48.72,18.39 46.28,18.39 E1.23 | v50.85,19.46 50.85,21.29 v51.46,21.89
  Bottom 0.152: v49.63,19.3 50.7,19.3 v50.85,19.46 | v51.46,21.89 51.46,24.03 55.73,28.3 55.73,30.58 v56.95,31.8
OK_HYST
  Top 0.152: 9.09,6.65 12.14,6.65 U5.10 | 9.09,6.65 8.18,7.57 R29.2 | 9.09,6.65 8.18,5.74 8.18,3.91 R30.1
OK_PROG
  Top 0.152: R30.2 9.85,3.91 11.84,5.89 12.9,5.89 U5.11 13.06,5.89 13.06,5.44 13.21,5.28 13.21,3.15 13.03,2.97 10.9,2.97 10.62,2.69 7.11,2.69 6.25,3.56 6.25,4.67 4.79,6.14 R31.1
P0.20  (via drill 0.35)
  Top 0.152: v53.9,15.95 53.9,17.17 E1.34 | v47.5,12.14 46.74,11.38 46.58,11.38 44.6,9.4 44.6,8.94 43.99,8.33 v43.54,8.33
  Bottom 0.152: v53.9,15.95 51.31,15.95 48.79,13.44 v47.5,12.14 | v43.54,8.33 39.42,8.33 31.19,16.56 29.82,16.56 28.45,17.93 J8.2
PWM1  (via drill 0.35)
  Top 0.152: v16.26,41.55 15.65,40.95 15.65,37.29 13.66,35.31 13.36,35.31 U1.6 | v56.95,24.49 55.42,24.49 53.14,22.2 v53.14,19.15 | v51,18.54 50.55,18.08 50.55,17.32 E1.29
  Bottom 0.152: v16.26,41.55 41.1,41.55 44.91,37.74 55.58,37.74 55.73,37.9 56.34,37.9 58.17,36.07 58.17,30.28 56.64,28.75 56.64,24.79 v56.95,24.49 | v53.14,19.15 51.61,19.15 v51,18.54
PWM2  (via drill 0.35)
  Top 0.152: v14.27,34.85 13.36,34.85 U1.5 | v38.66,35.31 v37.44,34.09 | v51.92,20.68 51.92,18.54 51.16,17.78 51.16,17.32 E1.30
  Bottom 0.152: v14.27,34.85 14.27,33.93 16.41,31.8 22.2,31.8 24.49,34.09 v37.44,34.09 | v38.66,35.31 49.78,35.31 51.77,33.33 57.1,33.33 57.56,32.87 57.56,31.5 56.03,29.97 56.03,24.79 v51.92,20.68
RAMEN  (via drill 0.35)
  Top 0.152: v56.03,37.29 54.2,39.12 Q3.1 | v56.19,35.61 55.27,34.7 55.27,30.43 v57.25,28.45 | v53.14,15.34 53.14,17.17 E1.33
  Bottom 0.152: v56.03,37.29 56.03,35.76 v56.19,35.61 | v57.25,28.45 57.25,25.1 57.56,24.79 57.56,16.56 56.64,15.65 56.64,13.67 56.95,13.36 56.95,12.75 56.64,12.45 56.09,12.45 55.17,13.36 54.35,13.36 53.14,14.58 v53.14,15.34
RECEN  (via drill 0.35)
  Top 0.152: v13.97,24.33 13.97,25.86 Q4.1 | v61.06,28.14 57.86,28.14 57.56,27.84 57.1,27.84 55.12,25.86 55.12,25.55 52.07,22.5 48.87,22.5 46.89,20.52 46.28,20.52 E1.20
  Bottom 0.152: v13.97,24.33 13.97,12.75 11.99,10.77 11.99,9.86 15.8,6.04 37.44,6.04 38.81,7.42 42.62,7.42 43.23,6.81 61.06,6.81 62.28,8.03 62.28,26.92 v61.06,28.14
RESET  (via drill 0.35)
  Top 0.152: 39.27,15.19 39.27,16.56 40.79,18.08 42.32,18.08 D3.A | 39.27,15.19 39.88,14.58 S1.2 | 36.98,14.58 38.66,14.58 39.27,15.19 | 36.98,14.58 36.07,14.58 S1.1 35.92,14.43 v35.92,10.92 | v35.92,17.78 35.31,18.39 34.34,18.39 R8.1 | 36.98,14.58 v36.98,16.26 | E1.35 54.51,17.32 54.38,17.46 54.38,18.04 53.85,18.57 53.85,19.3 53.59,19.56 53.59,20.83 54.15,21.38 v54.15,22.05 | v32.26,7.26 J1.10 | v26.92,12.45 26.92,13.97 27.18,14.22 JP1.2
  Bottom 0.152: v35.92,17.78 35.92,17.32 v36.98,16.26 38.51,16.26 47.8,25.55 48.56,25.55 48.87,25.25 48.87,21.13 49.94,20.07 52.32,20.07 53.59,21.34 53.59,21.84 53.8,22.05 v54.15,22.05 | v32.26,7.26 v35.92,10.92 28.45,10.92 v26.92,12.45
RXD  (via drill 0.35)
  Top 0.152: v47.5,15.95 48.41,15.04 48.41,13.67 49.12,12.95 50.2,12.95 R24.1 | v47.5,19.76 46.28,19.76 E1.21
  Bottom 0.152: v47.5,19.76 v47.5,15.95
SCL  (via drill 0.35)
  Top 0.152: 48.11,36.22 49.78,36.22 50.24,35.76 51,35.76 51.31,36.07 51.31,37.74 51.61,38.05 52.38,38.05 53.14,37.29 53.14,36.98 U3.6 | 48.11,36.22 47.5,36.22 R9.1 | v7.57,29.51 7.11,29.97 7.11,30.28 U$2.4 | 48.11,36.22 v48.11,34.09 48.87,33.33 v48.87,32.87 | v53.9,27.84 53.9,26.47 E1.3
  Bottom 0.152: v7.57,29.51 10.01,29.51 11.68,31.19 45.21,31.19 v48.11,34.09 | v48.87,32.87 v53.9,27.84
SDA  (via drill 0.35)
  Top 0.152: v51.92,34.09 49.02,31.19 47.5,31.19 R5.1 47.5,31.04 46.89,30.43 v46.43,30.43 | U3.5 54.36,36.83 54.36,36.53 v53.29,35.46 53.75,35 53.75,28.9 54.51,28.14 54.51,26.47 E1.2 | v11.84,30.43 9.55,30.43 U$2.5
  Bottom 0.152: v53.29,35.46 v51.92,34.09 | v46.43,30.43 v11.84,30.43
SLP  (via drill 0.35)
  Top 0.152: v12.9,37.59 13.97,36.53 13.97,36.07 13.82,35.92 13.36,35.92 U1.7 | v39.12,6.81 39.57,6.81 41.25,8.48 41.25,14.12 44.3,17.17 47.5,17.17 E1.25
  Bottom 0.152: v12.9,37.59 7.57,37.59 4.52,34.54 4.52,21.44 11.68,14.28 11.68,9.7 15.65,5.74 38.05,5.74 v39.12,6.81
SWDCLK  (via drill 0.35)
  Top 0.152: v54.81,15.95 55.27,16.41 55.27,17.17 E1.36 | v46.89,10.77 42.77,6.65 41.86,6.65 39.88,4.67 J1.4
  Bottom 0.152: v54.81,15.95 54.2,16.56 51,16.56 46.89,12.45 v46.89,10.77
SWDIO
  Top 0.152: J1.2 49.78,11.68 52.32,11.68 52.38,11.68 54.86,11.68 55.37,12.19 55.37,15.24 55.78,15.24 56.03,15.49 56.03,17.17 E1.37
SWO
  Top 0.152: E1.32 52.53,17.32 52.53,22.5 56.95,26.92 56.95,27.23 57.25,27.53 62.13,27.53 62.28,27.38 62.28,8.48 55.42,1.63 39.27,1.63 37.44,3.45 37.44,4.22 J1.6
TXD
  Top 0.152: E1.19 46.13,21.13 42.01,21.13 39.42,18.54 39.42,17.78 38.81,17.17 31.8,17.17 31.5,16.87 30.43,16.87 29.67,17.63 29.67,19.3 28.45,20.52 J8.4
V_BATT  (via drill 0.35)
  Top 0.152: 27.69,31.34 26.47,31.34 26.31,31.5 26.31,35 26.92,35.61 26.92,35.92 R3.2 | 27.69,31.34 27.84,31.19 27.84,29.82 25.86,27.84 25.86,21.59 23.42,19.15 22.05,19.15 21.74,18.85 21.74,18.39 JP3.1 | 11.84,36.83 11.38,36.37 U1.1 | 11.84,36.83 12.75,36.83 13.21,36.37 U1.8 | v32.26,33.17 33.63,33.17 Q1.3 33.78,33.33 v33.78,37.44 | v23.72,32.41 23.11,31.8 22.5,31.8 U4.7 | v56.34,13.06 56.19,13.21 56.19,14.12 R10.1 | v5.13,32.56 3.15,30.58 C1.1 | v11.68,36.98 11.84,36.83 | v28.14,31.8 27.69,31.34
  Bottom 0.152: 28.14,33.17 24.49,33.17 v23.72,32.41 22.81,31.5 14.88,31.5 11.38,35 | 28.14,33.17 v32.26,33.17 | v56.34,13.06 56.34,29.82 57.86,31.34 57.86,33.02 53.44,37.44 v33.78,37.44 | v5.13,32.56 5.13,34.7 5.44,35 11.38,35 | v11.68,36.98 11.68,36.53 11.38,36.22 11.38,35 | 28.14,33.17 v28.14,31.8
  pour Top: 1.78,1.52 62.74,1.52 62.74,42.16 1.78,42.16
V_USB
  Top 0.152: Q1.1 35.92,32.41 36.98,32.41 38.81,34.24 R1.2 | 35.46,32.72 35.76,32.41 Q1.1 | 35.46,32.72 34.85,33.33 34.85,36.53 D5.A | 35.46,32.72 28.45,25.71 J8.8 | 35.46,32.72 Q1.1
VBAT_OV
  Top 0.152: U5.7 12.14,8.18 11.84,8.18 10.62,9.4 10.62,11.99 10.31,12.29 8.94,12.29 8.18,11.53 R27.2 8.03,11.53 7.11,12.45 R28.1
VBATM  (via drill 0.35)
  Top 0.152: 27.08,32.41 27.08,34.24 R3.1 27.08,34.39 27.84,35.15 27.84,36.68 27.08,37.44 27.08,38.05 C7.1 | 27.08,32.41 27.08,32.26 R4.2 27.08,32.41 | v44.91,24.03 45.67,23.27 46.13,23.27 E1.16 | v43.69,28.14 43.69,28.75 v40.64,31.8 | v29.06,31.8 28.45,32.41 27.08,32.41
  Bottom 0.152: v44.91,24.03 44.91,26.92 v43.69,28.14 | v29.06,31.8 v40.64,31.8
VCC  (via drill 0.35)
  Top 0.152: 20.98,26.31 20.98,24.49 20.52,24.03 20.52,21.89 R12.1 | 20.98,26.31 20.68,26.62 20.07,26.62 U6.1 19.91,26.77 19.76,26.92 19.76,31.34 18.85,32.26 18.09,32.26 U4.1 | 23.11,30.89 25.55,28.45 25.55,26.01 24.94,25.4 24.33,25.4 U6.6 24.18,25.4 v22.5,25.4 | 23.11,30.89 22.96,31.04 22.5,31.04 U4.6 | R21.1 16.87,35.31 17.63,36.07 17.63,37.74 Q2.3 17.78,37.9 22.2,37.9 22.35,38.05 | 22.35,38.05 23.27,38.96 23.57,38.96 C9.1 | 23.11,30.89 24.49,32.26 24.49,35.92 22.35,38.05 | v21.28,26.62 20.98,26.31
  Bottom 0.152: v22.5,25.4 v21.28,26.62
VIN  (via drill 0.35)
  Top 0.152: JP4.2 15.8,19 14.12,20.68 14.12,22.61 C21.1 14.09,23 10.01,27.08 8.64,27.08 8.33,26.77 8.33,20.22 12.45,16.1 12.45,15.34 C15.1 12.6,15.34 12.9,15.34 13.66,16.1 15.8,16.1 17.02,14.88 C20.1 17.17,14.88 v18.39,14.88 | v14.43,10.31 14.43,9.4 U5.2 | v18.24,10.31 19.61,10.31 20.22,9.7 L4.1 | v28.3,27.23 28.75,27.23 31.65,30.12 31.65,35.15 31.34,35.46 31.19,35.46 30.73,35.92 R25.2
  Bottom 0.152: v14.43,10.31 v18.24,10.31 18.24,14.88 | v28.3,27.23 18.24,17.17 18.24,14.88 | 18.24,14.88 v18.39,14.88
VINM  (via drill 0.35)
  Top 0.152: Q5.1 42.62,28.45 v41.71,28.45 37.29,28.45 35,26.16 33.17,26.16 31.5,24.49 27.84,24.49 27.23,25.1 27.23,28.75 30.58,32.11 R26.2 30.58,32.26 30.58,34.09 | 30.58,34.09 30.58,34.24 R25.1 30.58,34.09 | 30.58,34.09 29.52,35.15 29.52,36.98 30.58,38.05 C25.1 | v43.99,26.77 46.89,26.77 47.19,26.47 47.19,24.33 46.89,24.03 46.28,24.03 E1.15
  Bottom 0.152: v43.99,26.77 43.38,26.77 v41.71,28.45
VLIPO  (via drill 0.35)
  Top 0.152: v58.93,13.21 58.01,14.12 R10.2 | v22.35,34.09 22.35,32.41 U4.8
  Bottom 0.152: J5.1 60.6,11.23 58.93,12.9 v58.93,13.21 57.86,14.28 57.86,27.08 58.47,27.69 58.47,36.68 52.98,42.16 15.95,42.16 15.65,41.86 15.65,41.25 22.35,34.54 v22.35,34.09
VOUT  (via drill 0.35)
  Top 0.152: U5.14 14.58,5.89 14.58,5.44 v15.19,4.83 15.34,4.67 18.09,4.67 18.24,4.52 18.24,3.3 19,2.54 22.5,2.54 23.72,3.76 L2.1 | v10.77,14.28 9.85,15.19 C19.1
  Bottom 0.152: v10.77,14.28 10.77,9.25 v15.19,4.83
VOUT_SET
  Top 0.152: U5.12 13.51,5.89 13.51,4.37 13.97,3.91 R18.1 14.12,3.91 17.32,3.91 R19.2
VRDIV
  Top 0.152: U5.8 12.14,7.57 9.85,7.57 R29.1 9.7,7.72 9.7,8.48 | 9.7,8.48 9.7,11.38 R27.1 | 9.7,8.48 7.42,8.48 7.11,8.18 7.11,3.3 7.42,3 10.31,3 11.07,3.76 12.29,3.76 R18.2
VREF_SAMP
  Top 0.152: U5.4 13.51,9.4 13.51,10.62 12.9,11.23 11.84,11.23 9.7,13.36 7.72,13.36 4.83,16.26 C16.1
VSTOR
  Top 0.152: 22.96,6.81 24.64,8.48 C14.1 | 22.96,6.81 21.89,5.74 18.69,5.74 18.54,5.89 18.54,6.81 17.17,8.18 15.8,8.18 U5.19 | 22.96,6.81 21.89,7.87 19.46,7.87 15.34,11.99 14.27,11.99 C22.1
WP
  Top 0.152: E1.4 53.14,26.47 53.14,28.14 52.53,28.75 52.53,36.37 52.07,36.83 U3.7

## Text on the board
tNames: MOTOR | REGULATOR | DIGIPOT | DRIVER | IBATT | FRAM | + | IMOTOR | V_USB | 3.3V | - | DTR | A5 | RECTIFIER | RXD | TXD | DIGI | VIN | V_BATT | P0.20 | GND | + | - | BATTERY | BQ25570 | SWDIO | BUTTON